# EAGLE board plinkplonk1 (EAGLE 7.5.0)

Size 50 x 50 mm. Coordinates in mm from the lower left corner, seen from the top.
Outline: 0,0 50,0 50,50 0,50 0,0
Copper layers (1*16): Top 0.035mm / dielectric 1.5mm / Bottom 0.035mm
Design rules "default": minimum track width 10mil, minimum drill 24mil, track to track 8mil, track to pad 8mil, pad to pad 8mil, via to via 8mil, smd to smd 8mil, copper to edge 40mil, drill to drill 8mil, minimum pad ring 10mil, minimum via ring 8mil, stop-mask expansion 4mil, vias tented up to drill 0mil, thermal gap 10mil

## Footprints (pad centres in the part's own frame; a part is rotated, then mirrored left to right if it is on the bottom)
CPOL-RADIAL-1000UF-25V = drill 0.9 pad 1.93 square: + 2.54,0 | drill 0.9 pad 1.93: - -2.54,0
DIODE-1N4001 = drill 1 pad 1.981: A -5.08,0; C 5.08,0
JST-2-PTH-VERT = drill 0.7 pad 1.6: 1 -1,-0.55; 2 1,-0.55
LED3MM = drill 0.813 pad 1.676 octagon: A -1.27,0; K 1.27,0
TO-263/D2PAK = smd 2.32 x 3.81: 1 -2.54,-7.045; 3 2.54,-7.045 | smd 11 x 9.65: 2 0,4.125
PMD = smd 1.7 x 5.4: 1 3.861,0; 2 -3.861,0
SOIC127P600X175-16N = smd 1.702 x 0.533: 1 -2.591,4.445; 2 -2.591,3.175; 3 -2.591,1.905; 4 -2.591,0.635; 5 -2.591,-0.635; 6 -2.591,-1.905; 7 -2.591,-3.175; 8 -2.591,-4.445; 9 2.591,-4.445; 10 2.591,-3.175; 11 2.591,-1.905; 12 2.591,-0.635; 13 2.591,0.635; 14 2.591,1.905; 15 2.591,3.175; 16 2.591,4.445
MICROMATCH-14 = drill 0.813: 1 8.255,1.27; 2 6.985,-1.27; 3 5.715,1.27; 4 4.445,-1.27; 5 3.175,1.27; 6 1.905,-1.27; 7 0.635,1.27; 8 -0.635,-1.27; 9 -1.905,1.27; 10 -3.175,-1.27; 11 -4.445,1.27; 12 -5.715,-1.27; 13 -6.985,1.27; 14 -8.255,-1.27

## Placement (x,y rotation side)
C1  [CPOL-RADIAL-1000UF-25V]  16.67,8.26 0 top
D1  [DIODE-1N4001]  10.64,39.61 0 top
J1  [JST-2-PTH-VERT]  10.88,44.77 0 top
LED1  [LED3MM]  43.5,36.99 0 top
Q1  100A/100V  [TO-263/D2PAK]  15.24,22.86 0 top
R1  [PMD]  10,-5 0 top  (outside the outline)
U1  74HC595D,118  [SOIC127P600X175-16N]  34.45,21.59 0 top
X1  MICROMATCH-14  [MICROMATCH-14]  34.13,44.77 0 top
X2  MICROMATCH-14  [MICROMATCH-14]  35,5 0 top

## Library data of the parts
C1 = SparkFun-Capacitors
D1 = SparkFun-DiscreteSemi
J1 = SparkFun-Connectors
LED1 = adafruit
Q1 = SparkFun-DiscreteSemi; PROD_ID: TRANS-12437
R1 = resistor-shunt; OC_FARNELL: unknown; OC_NEWARK: unknown
U1 = NXP_By_element14_Batch_1; MPN: 74HC595D,118; OC_FARNELL: 1826845; OC_NEWARK: 78R6262; PACKAGE: SOIC-16; SUPPLIER: NXP Semiconductors
X1 X2 = con-amp-micromatch; MF: FARNELL; MPN: 8-215464-4; OC_FARNELL: 3784678; OC_NEWARK: 19J6431

## Nets
N$1: D1.A J1.2 Q1.2
N$2: D1.C J1.1
N$3: C1.+ Q1.1
N$4: C1.- Q1.3
VCC: U1.16

## Tracks (layer width: path | path; a pad name or v marks a point on that pad's centre or on a via)
N$1  (2 unrouted)
N$2  (1 unrouted)
N$3  (1 unrouted)
N$4  (1 unrouted)